# Altium PCB ESP 32 BANG TAI.PcbDoc
Units mil, origin at the board's own origin, x right, y up, seen from the top; angles counter-clockwise.
Board outline 3005 x 2560 mil, 2 copper layers (Top Layer, Bottom Layer); 31 components, 32 nets, 135 pads, 16 vias.
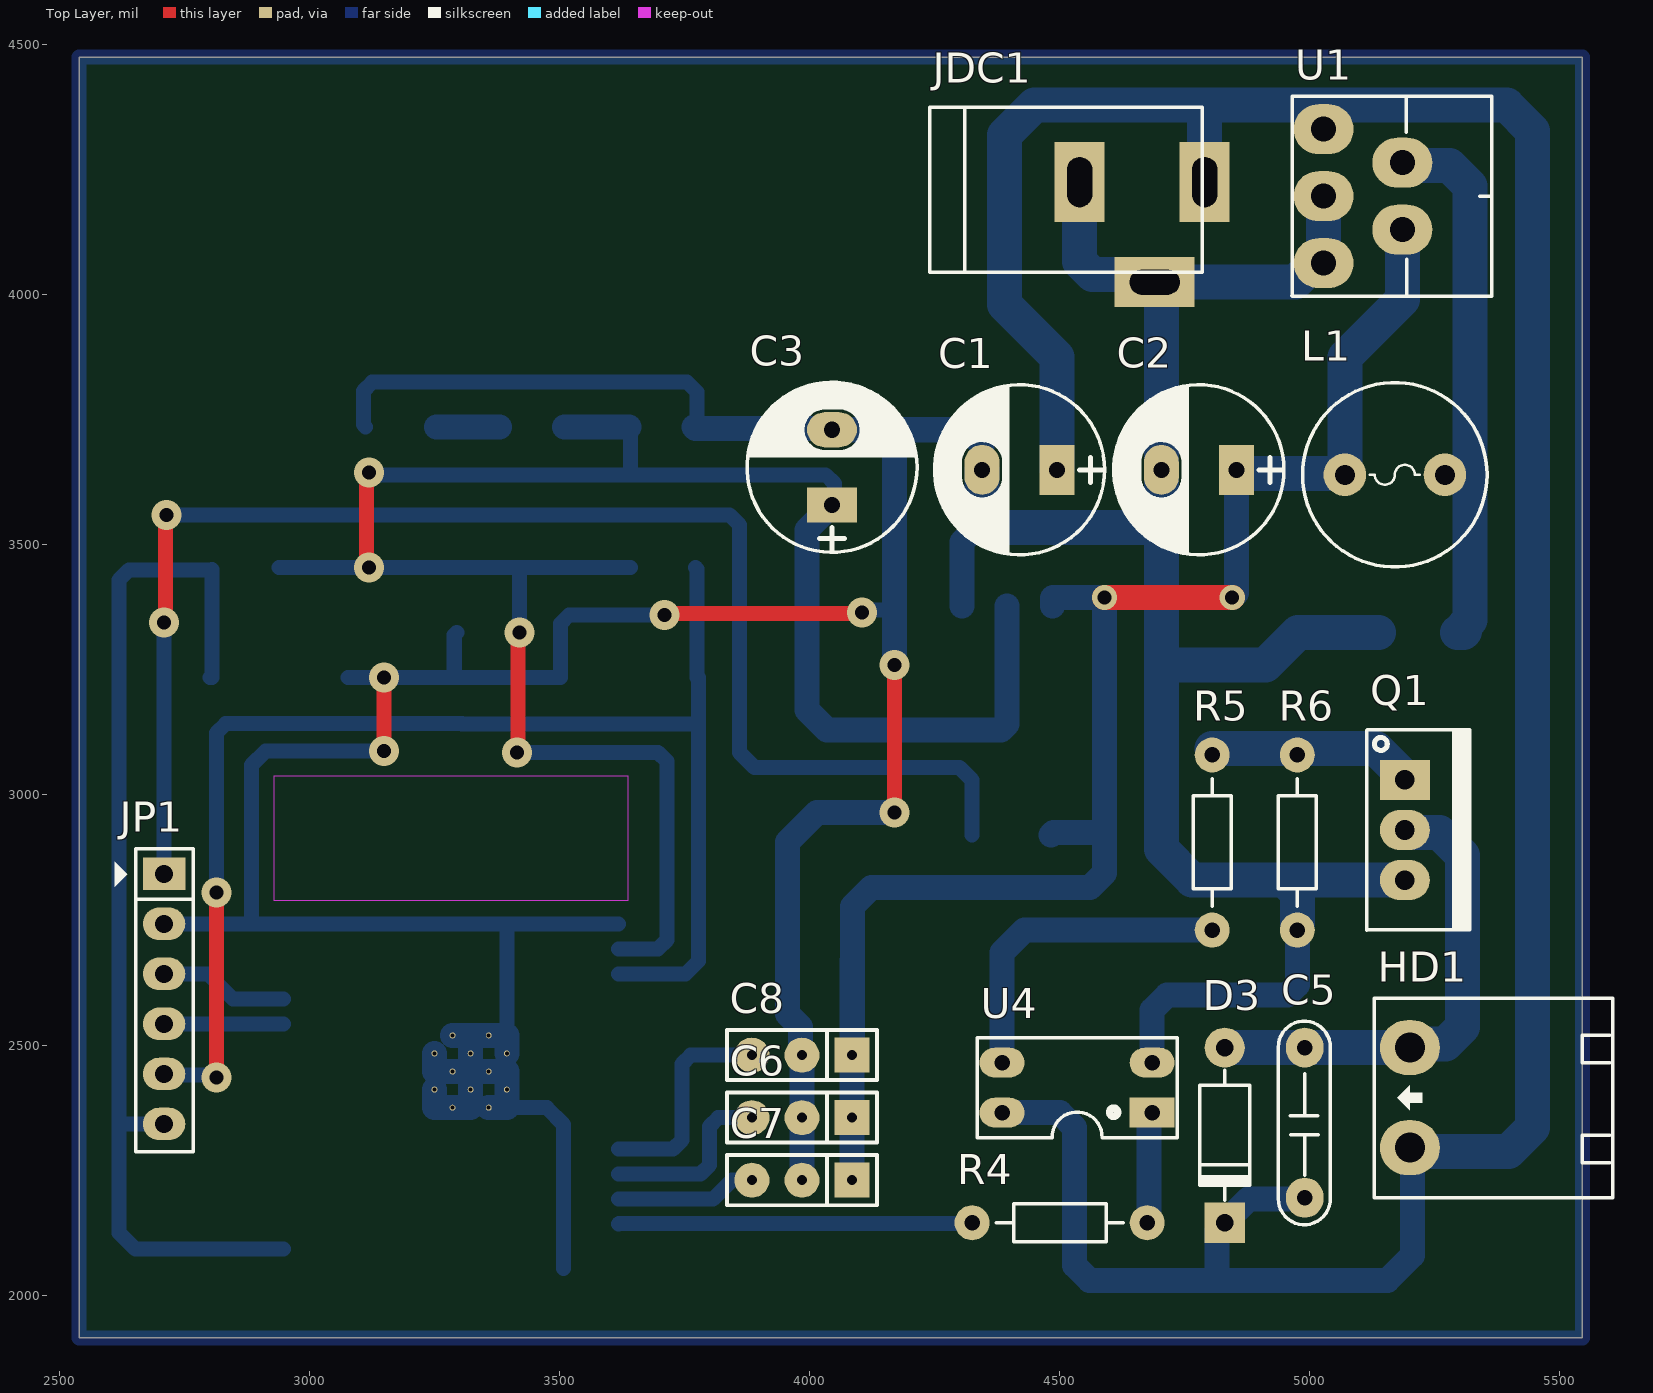
[diagram p0: Top Layer view]
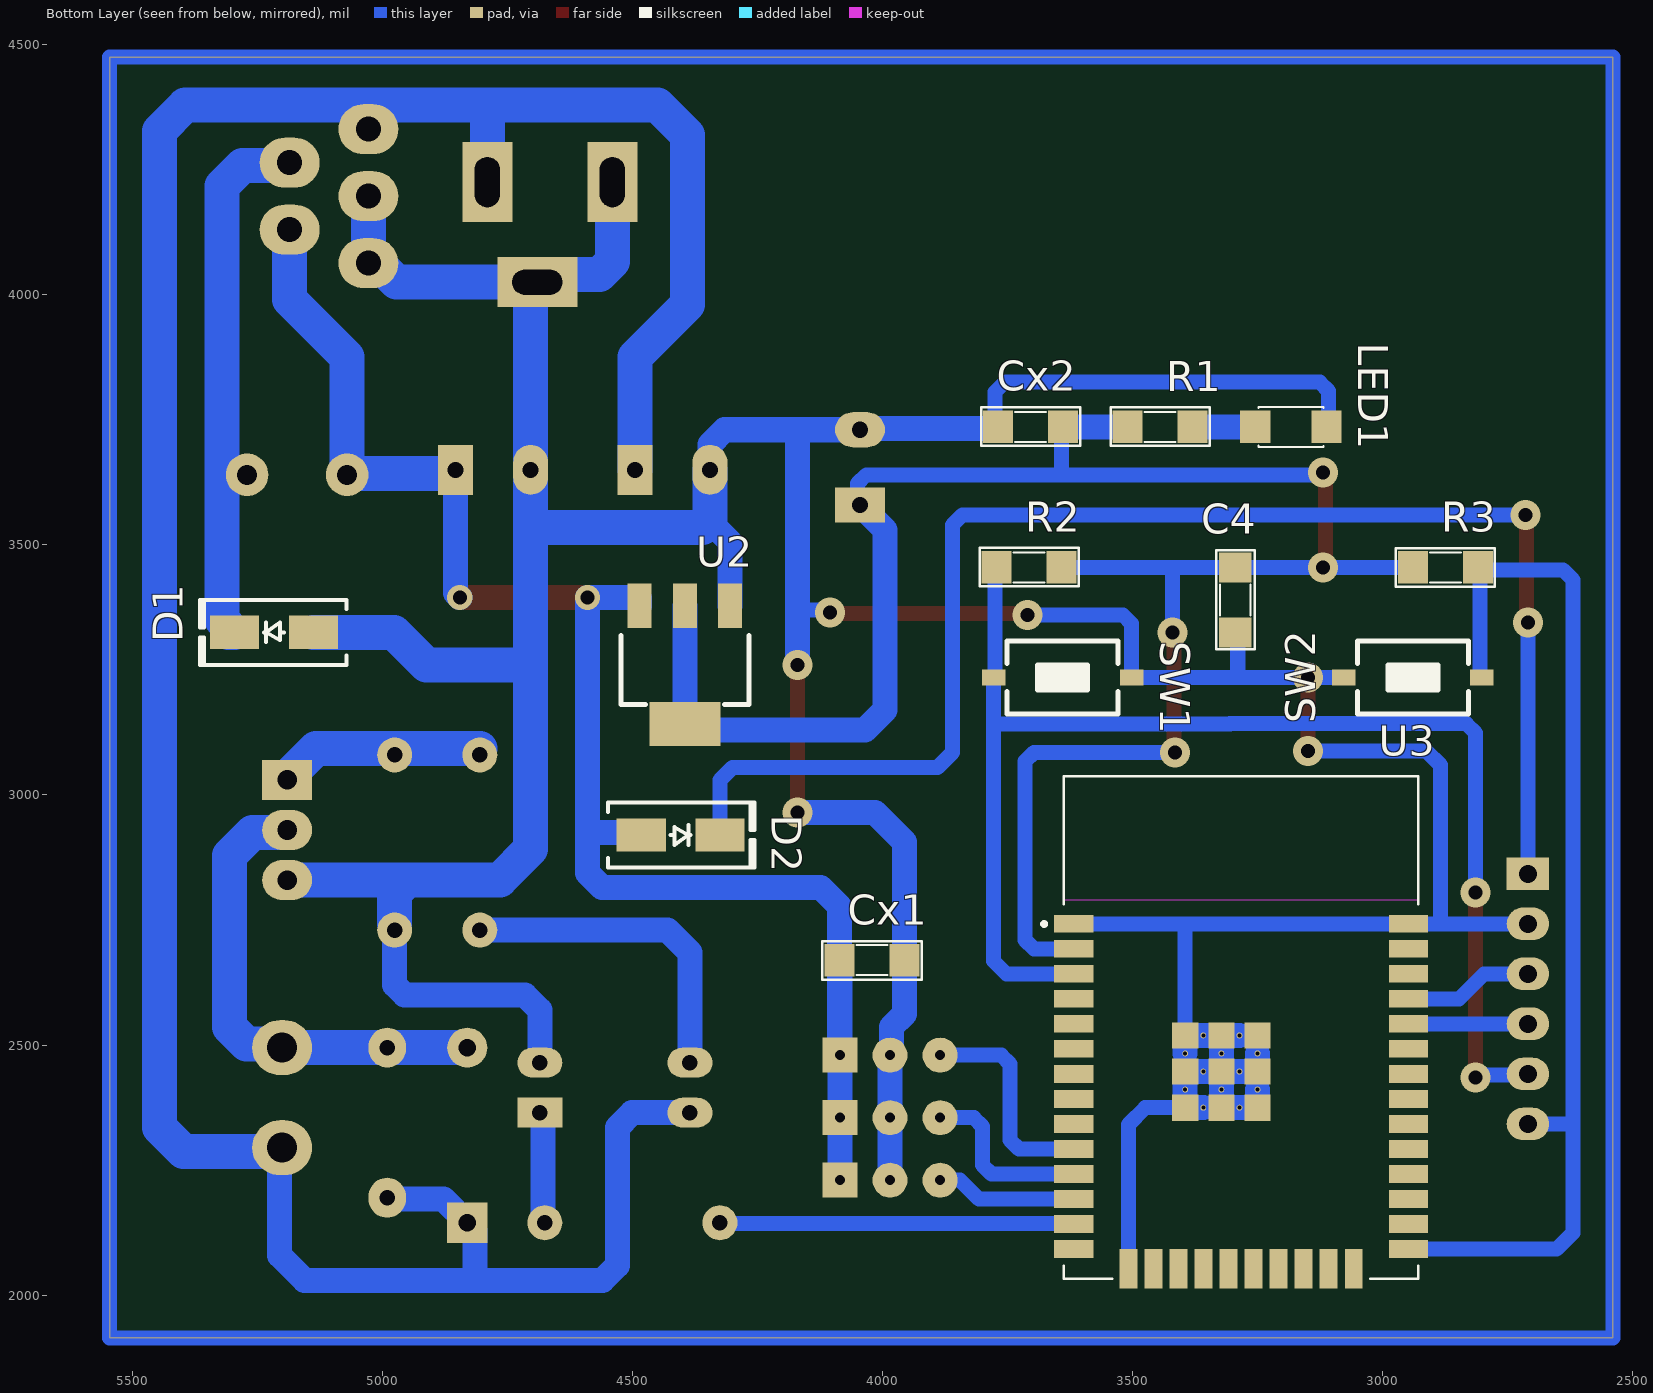
[diagram p1: Bottom Layer view, seen from below]
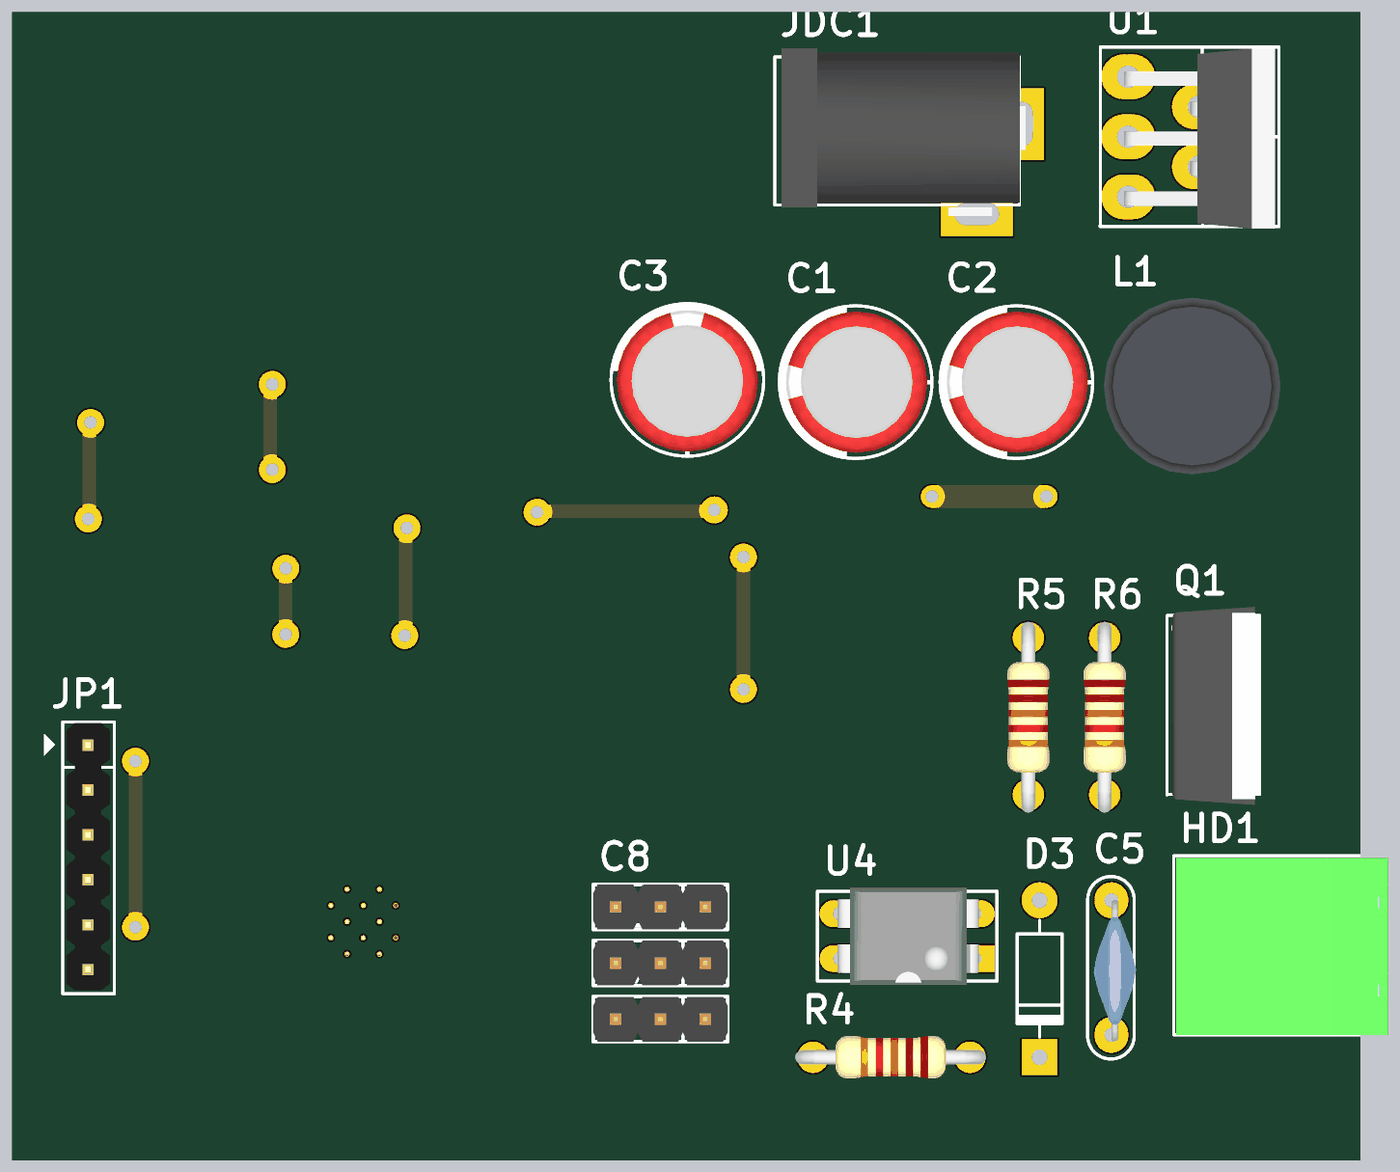
[diagram p2: 3D render of the assembled board from above, using the file's embedded part models]
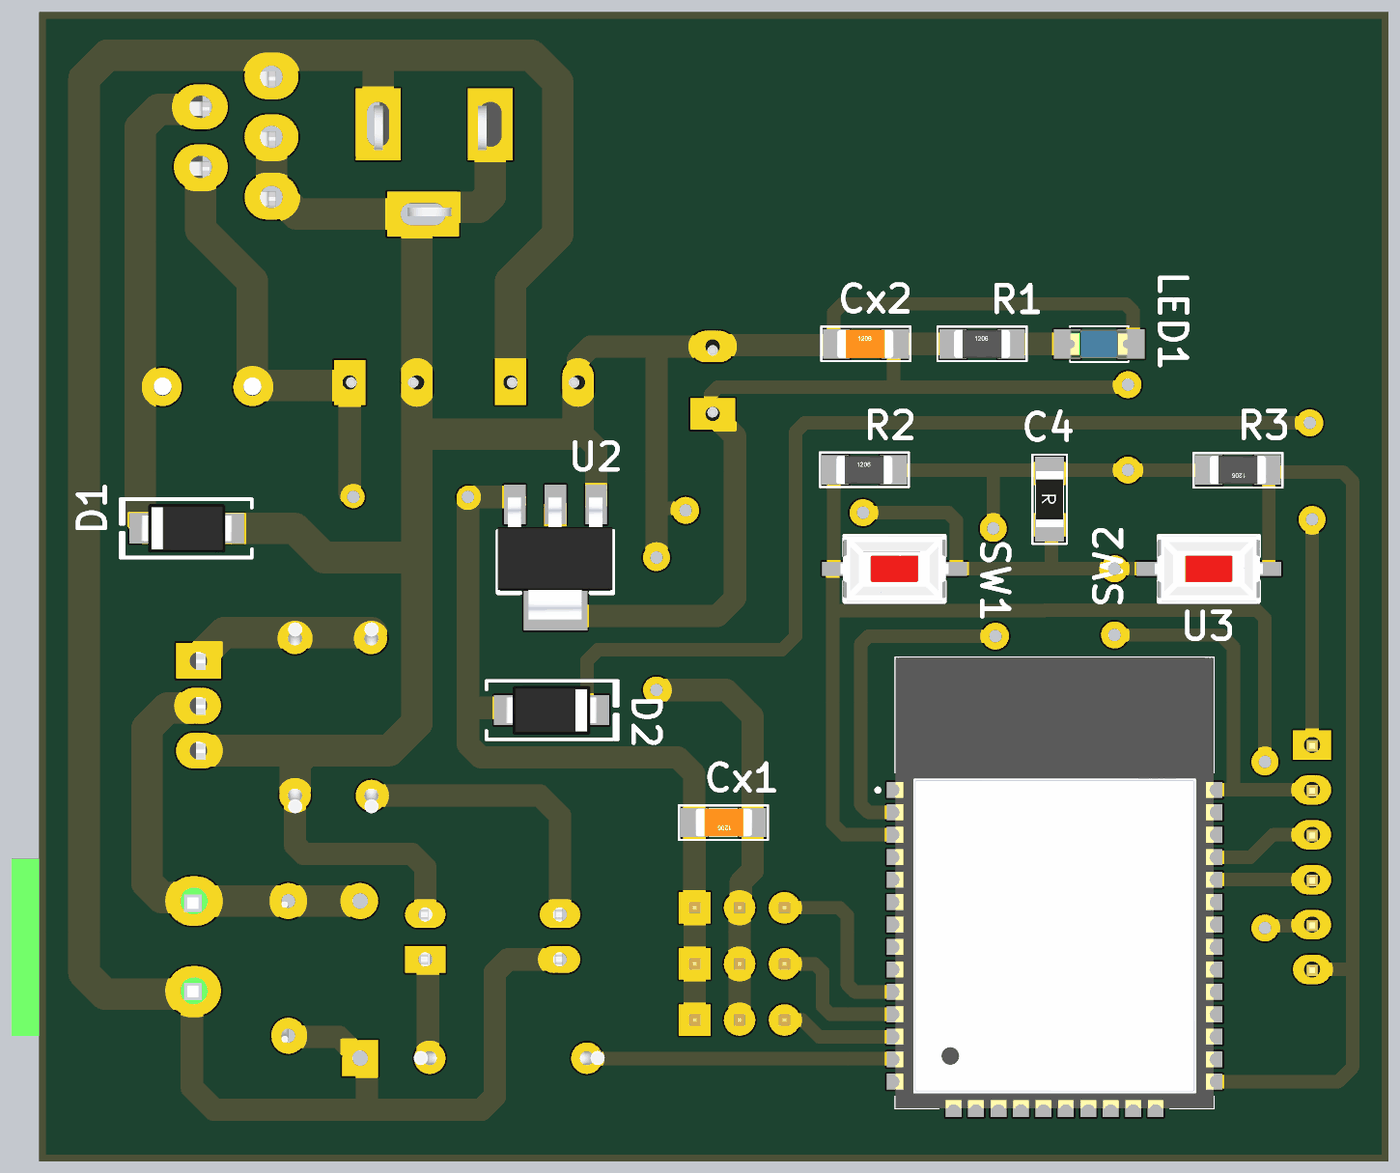
[diagram p3: 3D render of the assembled board from below, using the file's embedded part models]

## Layer stack, top to bottom
Top Solder: solder mask 0.4, Solder Resist, Dk 3.5
Top Layer: signal copper 1.4
Dielectric 1: dielectric 12.6, FR-4, Dk 4.8
Bottom Layer: signal copper 1.4
Bottom Solder: solder mask 0.4, Solder Resist, Dk 3.5

## Board outline
2540,1915 2540,4475 5545,4475 5545,1915

## Design rules (kind name [scope] priority, off if disabled: settings)
Clearance [All] p1: gap=10 ignorepadtopadclearanceinfootprint=FALSE
PolygonConnect [All] p1: connectstyle=Relief reliefconductorwidth=10 reliefentries=4 polygonreliefangle="90 Angle" airgapwidth=10
RoutingVias [All] p1: holewidth=28 width=50 viastyle="Through Hole" minholewidth=28 minwidth=50 maxholewidth=20 maxwidth=60
SolderMaskExpansion [All] p1: expansion=4
Width [All] p1: maxlimit=70 minlimit=30 preferedwidth=50
30 further rules are at their usual default settings.

## Components (designator, comment, footprint, x,y, rotation, side; value= is the part's Value field where it differs from the comment)
C1 "1000uF/16V" CP1.5/3.4 4495,3650 r180 top
C2 "1000uF/16V" CP1.5/3.4 4853.27,3650 r180 top
C3 "1000uF/16V" CP1.5/3.4 4045,3580 r90 top
C4 "103" SM-1206 3295,3390 r270 bottom
C5 "473" CN3 4990,2495 r270 top value=0,047uF
C6 "JP3" JP3-D1T 4085,2355 r180 top
C7 "JP3" JP3-D1T 4085,2230 r180 top
C8 "JP3" JP3-D1T 4085,2480 r180 top
Cx1 "XXpF" CN-SMD-1206 4020,2670 r0 bottom value=33pF
Cx2 "XXpF" CN-SMD-1206 3705,3735.71 r180 bottom value=33pF
D1 "SS34" "DIODE SMA" 5216.26,3325 r0 bottom
D2 "M7" "DIODE SMA" 4403.74,2920 r180 bottom
D3 "1N4007" D1A 4830,2495 r90 top
HD1 "TB2" HED2T 5200,2295 r90 top value="Header 2"
JDC1 "Jac DC" DC-IN 4665,4125 r0 top
JP1 "JP6 PIN" JP6 2710,2842.52 r270 top value=JP7
L1 "150mH" L01 5170,3640 r180 top value="150 mH"
LED1 "LED SMD" SM-LED-1206-Blue 3255,3735.71 r180 bottom
Q1 "IRF520" QTO-220 5190,3030 r270 top value=IRF840
R1 "1k" SM-RES-1206 3510,3735.71 r180 bottom value="R1/4W - 1K"
R2 "10k" SM-RES-1206 3772.01,3455 r180 bottom value="R1/4W - 1K"
R3 "10k" SM-RES-1206 2810,3455 r0 bottom value="R1/4W - 1K"
R4 "Res1" R1/4W 4325,2145 r0 top value=330
R5 "Res1" R1/4W 4805,2730 r90 top value=4K7
R6 "Res1" R1/4W 4975,2730 r90 top value=10K
SW1 "SW" SW1-SMD 3640,3235 r180 bottom value="SW chip 2 pin"
SW2 "SW" SW1-SMD 2940,3235 r0 bottom value="SW chip 2 pin"
U1 "LM2976" DIP5 5106.26,4196.93 r270 top
U2 "LM1117-3.3V" SOT223-4.CAOVANHUONG 4395,3260 r270 bottom
U3 "ESP32-WROOM-32" MODULE_ESP32-WROOM-32 3283.39,2535.43 r180 bottom
U4 "PC817" DIP4/W0.3 4685,2365 r90 top

## Footprints (in the part's own frame and the unit in brackets; to place one, negate y for a bottom-side part, rotate by r counter-clockwise, add the part's x,y. Pads: shape width x height; smd on the part's side, far side on the other; paste and mask are expansions set on the pad)
CN3 [mil] "Cap np W 0.3"
  oval 80x75 hole 31: 1(0,0) 2(300,0)
  silkscreen extent -53,-53 354,51, body extent 0,-39 315,55, height 419
CN-SMD-1206 [mil]
  rect 60x65 smd: 1(-64,0) 2(66,0)
  silkscreen extent -98,-38 100,39, body extent -63,-31 63,31, height 40
CP1.5/3.4 [mil] "Tu hoa 220->470uF,16V, 470uF/16V,25V"
  rect 70x100 hole 32: 1(0,0)
  oval 70x100 hole 32: 2(150,0)
  silkscreen extent -95,-170 245,170, body extent -85,-157 230,157, height 446
D1A [mil] "Diode 1A, W 100mil, L 350mil"
  round 80 hole 35: 1(0,0)
  rect 80x80 hole 35: 2(-350,0)
  silkscreen extent -305,-50 -45,50, body extent -366,-42 16,41, height 100
DC-IN [mil] "Jac DC input"
  rect 100x160 hole 50 slot 100 at 90 deg: 1(125,100) 2(-125,100)
  rect 160x100 hole 50 slot 100 at 0 deg: 3(25,-100)
  silkscreen extent -425,-80 120,250, body extent -410,-105 134,269, height 434
"DIODE SMA" [mm] "SMA"
  rect 2.5x1.7 smd: 1(-2,0) 2(2,0)
  silkscreen extent -3.68,-1.65 3.75,1.65, body extent -2.6,-1.37 2.6,1.37, height 2.4
DIP4/W0.3 [mil] "4 PIN, W 300mil, Pin to pin 100mil"
  rect 60x90 hole 31: 1(0,0)
  oval 60x90 hole 31: 2(100,0) 3(100,300) 4(0,300)
  silkscreen extent -50,-50 150,350, body extent -59,-10 159,305, height 170
DIP5 [mm]
  oval 2.54x3.048 hole 1.27: 1(-3.4,-2) 2(-1.7,2) 3(0,-2) 4(1.7,2) 5(3.4,-2)
  silkscreen extent -5.08,-3.61 5.08,6.53, body extent -4.99,-2.25 5.21,6.31, height 18.81
HED2T [mil] "Header 2, 2 pin, hight 300mil, Pin to Pin 200, Colour Green"
  oval 110x120 hole 60: 1(0,0) 2(200,0)
  silkscreen extent -100,-406 299,71, body extent -100,-406 294,66, height 334
JP3-D1T [mil] "3 pins, 1 row, straight, gold plating"
  rect 70x70 hole 20: 1(0,0)
  round 70 hole 20: 2(100,0) 3(200,0)
  silkscreen extent -50,-50 250,50, body extent -50,-50 250,50, height 336
JP6 [mil] "JP6"
  rect 65x85 hole 36: 1(0,0)
  oval 65x85 hole 36: 2(100,0) 3(200,0) 4(300,0) 5(400,0) 6(500,0)
  silkscreen extent -50,-99 556,58, body extent -48,-50 548,48, height 323
L01 [mil] "Inductor"
  round 85 hole 40: 1(-100,0) 2(100,0)
  silkscreen extent -184,-184 184,184, body extent -197,-198 197,195, height 473
MODULE_ESP32-WROOM-32 [mm]
  rect 2x0.9 smd: 1(-8.5,5.26) 2(-8.5,3.99) 3(-8.5,2.72) 4(-8.5,1.45) 5(-8.5,0.18) 6(-8.5,-1.09) 7(-8.5,-2.36) 8(-8.5,-3.63) 9(-8.5,-4.9) 10(-8.5,-6.17) 11(-8.5,-7.44) 12(-8.5,-8.71) 13(-8.5,-9.98) 14(-8.5,-11.25) 25(8.5,-11.25) 26(8.5,-9.98) 27(8.5,-8.71) 28(8.5,-7.44) 29(8.5,-6.17) 30(8.5,-4.9) 31(8.5,-3.63) 32(8.5,-2.36) 33(8.5,-1.09) 34(8.5,0.18) 35(8.5,1.45) 36(8.5,2.72) 37(8.5,3.99) 38(8.5,5.26)
  rect 0.9x2 smd: 15(-5.715,-12.25) 16(-4.445,-12.25) 17(-3.175,-12.25) 18(-1.905,-12.25) 19(-0.635,-12.25) 20(0.635,-12.25) 21(1.905,-12.25) 22(3.175,-12.25) 23(4.445,-12.25) 24(5.715,-12.25)
  rect 1.33x1.33 smd: 39_1(-2.835,-0.405) 39_2(-1,-0.405) 39_3(0.835,-0.405) 39_4(-2.835,-2.24) 39_5(-1,-2.24) 39_6(0.835,-2.24) 39_7(-2.835,-4.075) 39_8(-1,-4.075) 39_9(0.835,-4.075)
  round 0.3 hole 0.2: 39_10(-1.917,-0.405) 39_11(-0.082,-0.405) 39_12(-2.835,-1.322) 39_13(-1,-1.322) 39_14(0.835,-1.322) 39_15(-1.917,-2.24) 39_16(-0.082,-2.24) 39_17(-2.835,-3.157) 39_18(-1,-3.157) 39_19(0.835,-3.157) 39_20(-1.917,-4.075) 39_21(-0.082,-4.075)
  Keep-Out Layer region: 9,6.45 -9,6.45 -9,12.75 9,12.75
  Keep-Out Layer region: 9,6.45 -9,6.45 -9,12.75 9,12.75
  silkscreen extent -10.1,-12.75 9,12.75, body extent -9,-12.75 9,12.75, height 3.2
QTO-220 [mil] "TO-220 - 1-2-3"
  rect 80x100 hole 39: 1(0,0)
  oval 80x100 hole 39: 2(100,0) 3(200,0)
  silkscreen extent -100,-76 300,130, body extent -119,-64 322,121, height 755
R1/4W [mil] "R 1/4W, 2 Pin, 350mil"
  round 70 hole 31: 1(0,0) 2(350,0)
  silkscreen extent 48,-38 302,38, body extent -40,-47 386,47, height 111
SM-1206 [mil] "Compoment SMD 120x60mil"
  rect 60x65 smd: 1(-65,0) 2(65,0)
  silkscreen extent -99,-38 99,39, body extent -83,-35 83,36, height 25
SM-LED-1206-Blue [mil] "Compoment SMD 120x60mil"
  rect 60x65 smd: 1(0,0) 2(142,0)
  silkscreen extent 6,-40 136,40, body extent 7,-31 133,31, height 43
SM-RES-1206 [mil]
  rect 60x65 smd: 1(0,0) 2(130,0)
  silkscreen extent -34,-38 164,39, body extent 2,-31 128,31, height 40
SOT223-4.CAOVANHUONG [mm] "SOT223, 4-Leads, Body 6.5x3.5mm, Pitch 2.3mm, Lead Span 7mm, IPC Medium Density"
  rect 2.24x1.22 smd: 1(-3,2.3) 2(-3,0) 3(-3,-2.3)
  rect 2.24x3.6 smd: 4(3,0)
  silkscreen extent -1.5,-3.25 2,3.25, body extent -3.39,-3.27 3.5,3.23, height 1.72
SW1-SMD [mm]
  rect 1.2x0.8 smd: 1(-3.5,0) 2(3.5,0)
  silkscreen extent -2.82,-1.85 2.82,1.85, body extent -3.05,-1.85 3.05,1.85, height 2.5

## Part data
C1 C2 C3: library part CP4, "Cap 1000uF/16V - 220uF/50V", Description 1="2200uF-3300uF/6,3V - 1000uF-2200uF/10V", Description 2="1000uF/16V - 470uF => 1000uF/25V - 100uF/100V", Description 3=330uF>470uF/35V_220uF>470uF/50V_10uF>22uF/250V, Description 4="220uF => 330uF/63V - 10uF =>33uF/160 - 200V", Description 5="4,7uF>10uF/250V_3,3uF>10uF/400V - 2,2uF>4,7uF/450V"
C4: library part C, "Cap SMD"
C5: library part CN3, "Cap np W0.3", Copyright=VanDungEvn
C6 C7 C8: "WR-PHD 2.54 mm Angled Socket Header", Manufacturer="Würth Elektronik eiSos GmbH", partNo=613003143121, ComponentLink1 Description=Manufacturer, ComponentLink1URL=http://www.we-online.com, ComponentLink2 Description=Datasheet, ComponentLink2URL=http://katalog.we-online.de/em/datasheet/6130xx143121.pdf, Created by="Karrer Zheng", Created Date="29 March 2013", NoPins=03
Cx1 Cx2: library part CN
D1: library part "Diode SS34 ( 1N5822 )", "D醤", Chung_Loai=D醤, Don_Vi=Con, Ma_Hang=MH002104, Ten_Linh_Kien="Diode SS34 3A 40V SMA ( 1N5822 SS34A)"
D2: library part "Diode M7 ( 4007 )", "D醤", Chung_Loai=D醤, Don_Vi=Con, Ma_Hang=MH000944, Ten_Linh_Kien="Diode M7 1N4007 SMD 1A 1000V"
D3: library part D1A, "Diode 1A"
HD1: library part Hed2, "Header 2 (Green)"
JDC1: library part DCIN, "Jac DC input"
JP1: library part JP6
L1: library part Inductor, "Inductor"
LED1: library part LED-SMD-1206
Q1: library part IRF840, "MOSFET N - CHANNEL 500V - 0.75 - 8A - TO-220"
R1 R2 R3: library part R, "Resistor 1/4W"
R4 R5 R6: library part Res1_1, "Resistor", Manufacturer="Generic Components", Class=Passive, Published=08/06/2000, Publisher="Altium Hobart Technology Centre", SubClass=Resistor
SW1 SW2: library part SW2, "Switch button 2 pin"
U1: library part LM2596, Max Input Voltage="12 V", Max Output Current="3 (6.0 peak) A", Max Output Voltage=mV, Temperature Range="-40 to +125 degC", Category=IC-Power, Min Input Voltage=mV, Min Output Voltage=mV, Mounting Technology="Surface Mount", Status=Unreleased, Supply Voltage=mV
U2: library part LM1117, "800mA Low-Dropout Linear Regulator", Creator="Nguyen Ba Bien", Website=http://group3i.net
U3: "Bluetooth, WiFi 802.11b/g/n, Bluetooth v4.2 +EDR, Class 1, 2 and 3 Transceiver Module 2.4GHz ~ 2.5GHz Antenna Not Included, U.FL Surface Mount", Package="Module Espressif Systems", Availability="In Stock", Check_prices=https://www.snapeda.com/parts/ESP32-WROOM-32/Espressif+Systems/view-part/?ref=eda, MF="Espressif Systems", MP=ESP32-WROOM-32, Price=None, Purchase-URL=https://pricing.snapeda.com/search/part/ESP32-WROOM-32/?ref=eda, SnapEDA_Link=https://www.snapeda.com/parts/ESP32-WROOM-32/Espressif+Systems/view-part/?ref=snap
U4: "Single Opto"

## Via types
v1: diameter 60, hole 28, Top Layer to Bottom Layer, 14 vias
v2: diameter 50, hole 28, Top Layer to Bottom Layer, 2 vias

## Nets (pads, with @x,y where several pads share a name; then routed paths per layer and width w, separated by ;. In a path a pad name is that pad's centre, name@x,y a point inside that pad or via, vN(x,y) a via of type N, cw(c..) or ccw(c..) an arc to the next point about the centre after c; other vN are vias at no path point)
3V3: C3.1 C4.1 Cx2.2 R1.1 R2.2 R3.2 U2.2 U2.4 U3.2 | length 4337.3
  Top Layer w30: v1(3120,3455) 3115,3460 3115,3640 v1(3120,3645) ; v1(3415,3085) 3417.5,3087.5 3417.5,3322.5 v1(3420,3325)
  Bottom Layer w30: R3.2 v1(3120,3455) C4.1 3425,3455 ; v1(3120,3645) 3125,3640 3641.79,3640 ; v1(3415,3085) 3697.43,3085 3715,3067.43 3715,2710.09 3697.43,2692.52 U3.2 ; v1(3420,3325) 3420,3450 3425,3455 ; Cx2.2 3641.79,3732.92 3641.79,3640 ; R2.2 3425,3455 ; C3.1 4050,3585 4050,3622.43 4032.43,3640 3641.79,3640
  Bottom Layer w50: R1.1 Cx2.2 ; C3.1 3995,3530 3995,3170 4035,3130 4383.11,3130 U2.4 U2.2
+5V: C2.1 C6.1 C7.1 C8.1 Cx1.2 D2.1 L1.2 U1.4 U2.3 | length 3129.6
  Top Layer w50: v2(4590,3395) v2(4845,3395)
  Bottom Layer w50: C7.1 C6.1 C8.1 4085.5,2480.5 4085.5,2669.5 Cx1.2 4086,2777.5 4123.5,2815 4560.71,2815 4590,2844.29 4590,2925 ; D2.1 4487.48,2925 4590,2925 ; U2.3 4485.55,3394.02 4486.54,3395 v2(4590,3395) 4590,2925 ; v2(4845,3395) 4853.27,3403.27 4853.27,3642.87 C2.1
  Bottom Layer w70: C2.1@4853.27,3642.87 5067.13,3642.87 L1.2 5070,3875 5185,3990 U1.4
+12: C1.1 C5.2 D3.2 HD1.1 JDC1.1 U1.1 U4.4 | length 5879.7
  Bottom Layer w50: U4.4 4500.71,2365 4530,2335.71 4530,2060 4560,2030 4800.71,2030 ; C5.2 4985.22,2190.22 4982.93,2192.5 4877.5,2192.5 D3.2 4815,2130 4815,2044.29 4800.71,2030 ; HD1.1 5205,2290 5205,2080 5155,2030 4800.71,2030
  Bottom Layer w70: C1.1 4495,3875 4390,3980 4390,4318.99 4449.86,4378.86 5393.66,4378.86 5445,4327.52 5445,2335 5397.35,2287.35 5207.65,2287.35 HD1.1@5205,2290 ; JDC1.1 4790,4370
EN: JP1.5 R2.1 SW1.1 U3.3 | length 2729.1
  Top Layer w30: v1(2815,2435) v1(2815,2805)
  Bottom Layer w30: JP1.5 2712.52,2440 2810,2440 v1(2815,2435) ; v1(2815,2805) 2815,3124.32 2833.18,3142.5 3305.18,3142.5 3305.79,3141.89 3777.8,3141.89 ; U3.3 3752.52,2642.52 3777.8,2667.8 3777.8,3141.89 ; R2.1 3774.9,3452.11 3774.9,3235.75 3775.65,3235 SW1.1 3777.8,3141.89
GND: C1.2 C2.2 C3.2 C4.2 C6.2 C7.2 C8.2 Cx1.1 Cx2.1 D1.1 JDC1.2 JDC1.3 JP1.2 LED1.2 Q1.3 R6.1 SW1.2 SW2.2 U1.3 U1.5 U2.1 U3.1 U3.15 U3.38 U3.39_1 U3.39_2 U3.39_3 U3.39_4 U3.39_5 U3.39_6 U3.39_7 U3.39_8 U3.39_9 U3.39_10 U3.39_11 U3.39_12 U3.39_13 U3.39_14 U3.39_15 U3.39_16 U3.39_17 U3.39_18 U3.39_19 U3.39_20 U3.39_21 U4.2 | length 11636.4
  Top Layer w30: v1(3150,3087.5) v1(3150,3235) ; v1(3710,3360) 3712.5,3362.5 4102.5,3362.5 v1(4105,3365) ; v1(4170,2965) v1(4170,3260)
  Bottom Layer w30: JP1.2 2885,2742.52 ; SW2.2 v1(3150,3235) 3290,3235 ; LED1.2 3108.39,3740.32 3108.39,3807.43 3125.96,3825 3755.65,3825 3775.65,3805 3775.65,3742.36 Cx2.1 ; v1(3150,3087.5) 2912.5,3087.5 2885,3060 2885,2742.52 ; C4.2 3290,3320 3290,3235 ; U3.39_7 3475,2375 3508.39,2341.61 U3.15 ; U3.39_1 3395,2742.52 ; U3.1 3395,2742.52 ; v1(3710,3360) 3519.78,3360 3502.2,3342.43 SW1.2 3290,3235 ; v1(4105,3365) 4110,3370 4170,3370 ; 2885,2742.52 U3.38 3395,2742.52
  Bottom Layer w50: U3.39_19 U3.39_9 U3.39_21 U3.39_8 U3.39_18 U3.39_5 ; U3.39_14 U3.39_6 U3.39_16 U3.39_5 ; U3.39_11 U3.39_2 ; U3.39_20 U3.39_7 U3.39_17 U3.39_4 U3.39_15 U3.39_5 ; U3.39_12 U3.39_1 U3.39_10 U3.39_2 ; Cx2.1 3771.85,3732.86 4042.14,3732.86 C3.2 4170,3730 ; C7.2 C6.2 C8.2 3982.51,2482.49 3982.51,2535.99 3956,2562.5 Cx1.1 3956,2906 4015,2965 v1(4170,2965) ; v1(4170,3260) 4170,3370 4170,3730 ; U2.1 4304.45,3505.45 4333.99,3535 4360,3535 ; C1.2 4345,3700.71 4315.71,3730 4170,3730 ; U4.2 4685,2570 4715,2600 4955,2600 4975,2620 R6.1 ; U3.39_5 U3.39_13 U3.39_2
  Bottom Layer w70: 4345,3546.01 C1.2 ; 4360,3535 4688.27,3535 4703.27,3550 ; JDC1.2 4540,4066.01 4566.01,4040 4675,4040 JDC1.3 ; R6.1@4975,2742.8 4975,2803.99 4948.99,2830 ; U1.3 U1.5 5009.4,4063.07 4971.33,4025 JDC1.3 ; D1.1 4976.28,3325 4911.28,3260 4703.27,3260 ; Q1.3 4948.99,2830 ; JDC1.3 4703.27,4011.73 C2.2 4703.27,3550 ; 4703.27,3260 4703.27,3550 ; 4703.27,3260 4703.27,2891.73 4765,2830 4948.99,2830
GPIO0: JP1.6 R3.1 SW2.1 U3.25 | length 2151.6
  Bottom Layer w30: JP1.6 2620,2342.52 ; SW2.1 2805.35,3235 2806.1,3235.75 2806.1,3451.1 2805,3450 2640,3450 2620,3430 2620,2342.52 ; U3.25 2652.48,2092.52 2620,2125 2620,2342.52
IO13: U3.16
IO14: R4.1 U3.13 | length 708
  Bottom Layer w30: U3.13 3619.27,2143.76 4323.76,2143.76 R4.1
IO16: U3.27
IO17: U3.28
IO18: U3.30
IO19: U3.31
IO23: U3.37
IO25: C8.3 U3.10 | length 433.9
  Bottom Layer w30: U3.10 3727.43,2292.52 3745,2310.09 3745,2462.43 3762.57,2480 C8.3
IO26: C6.3 U3.11 | length 358.9
  Bottom Layer w30: U3.11 3782.43,2242.52 3800,2260.09 3800,2337.43 3817.57,2355 C6.3
IO27: C7.3 U3.12 | length 282.5
  Bottom Layer w30: U3.12 3807.52,2192.52 3845,2230 C7.3
IO32: U3.8
IO33: U3.9
IO34: U3.6
IO35: U3.7
NetC5_1: C5.1 D3.1 HD1.2 Q1.2 | length 971.1
  Bottom Layer w70: D3.1 C5.1 HD1.2 5207.65,2502.65 5271.65,2502.65 5305,2536.01 5305,2878.99 5258.99,2925 5195,2925 Q1.2
NetD1_2: D1.2 L1.1 U1.2 | length 1064.3
  Bottom Layer w70: U1.2 5190.74,4258.12 5278.99,4258.12 5320,4217.11 5320,3350 5309.21,3339.21 5309.21,3326.54 5307.68,3325 D1.2
NetD2_2: D2.2 JP1.1 | length 2925.6
  Top Layer w30: v1(2710,3345) 2712.5,3347.5 2712.5,3557.5 v1(2715,3560)
  Bottom Layer w30: JP1.1 v1(2710,3345) ; v1(2715,3560) 3840,3560 3860,3540 3860,3085 3890,3055 4300,3055 4325,3030 D2.2
NetLED1_1: LED1.1 R1.2 | length 125
  Bottom Layer w50: LED1.1 R1.2
NetQ1_1: Q1.1 R5.2 R6.2 | length 408.9
  Bottom Layer w70: R5.2@4805,3092.8 4975,3092.8 5132.2,3092.8 Q1.1@5190,3035
NetR4_2: R4.2 U4.1 | length 224.8
  Bottom Layer w50: R4.2 4678.83,2148.83 4678.83,2360 4683.83,2365 U4.1
NetR5_1: R5.1 U4.3 | length 658.6
  Bottom Layer w50: U4.3 4385,2685 4430,2730 R5.1
RX0_ESP: JP1.4 U3.34 | length 238.7
  Bottom Layer w30: JP1.4 U3.34
SCL: U3.36
SDA: U3.33
SS_PIN1: U3.29
TX0_ESP: JP1.3 U3.35 | length 259.5
  Bottom Layer w30: JP1.3 2797.5,2642.5 2847.48,2592.52 U3.35
pads on no net: U3.4 U3.5 U3.14 U3.17 U3.18 U3.19 U3.20 U3.21 U3.22 U3.23 U3.24 U3.26 U3.32
copper on no net: | length 11130
  Bottom Layer w30: 2540,1915 2540,4475 5545,4475 5545,1915 2540,1915

## Text inside footprints (layer, text, board x,y; h text height)
U3: Mechanical 13 "ANTENNA" at 3519.61,2889.76 h70